# EAGLE board *FM-Radio (EAGLE 7.2.0)
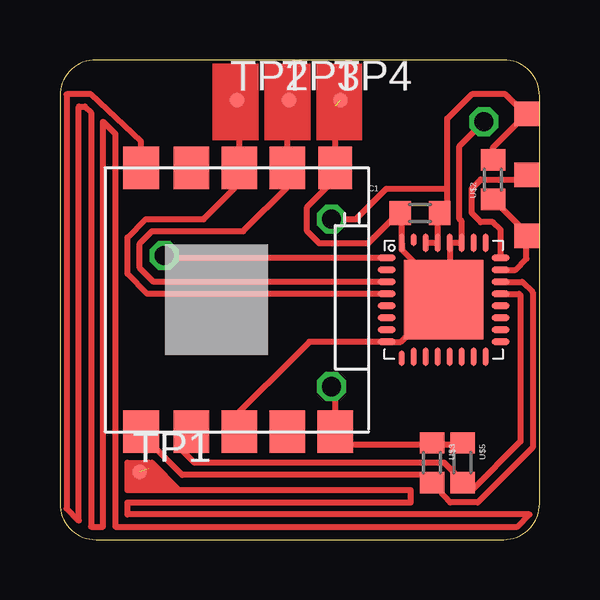
[diagram p0: board, top side]
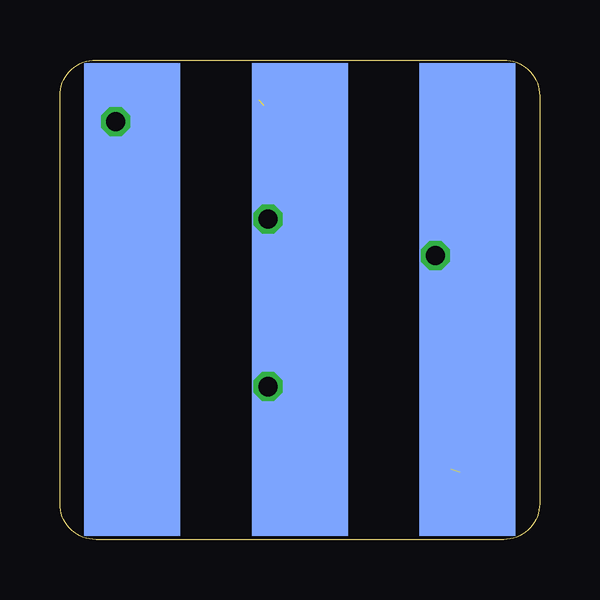
[diagram p1: board, bottom side, seen from below]

Size 20 x 20 mm. Coordinates in mm from the lower left corner, seen from the top.
Copper layers (1*16): Top 0.035mm / dielectric 1.5mm / Bottom 0.035mm
Design rules "Bilex DRU *": minimum track width 10mil, minimum drill 24mil, track to track 10mil, track to pad 10mil, pad to pad 10mil, via to via 10mil, smd to smd 10mil, copper to edge 1mil, drill to drill 8mil, minimum pad ring 10mil, minimum via ring 8mil, stop-mask expansion 4mil, vias tented up to drill 0mil, thermal gap 10mil

## Footprints (pad centres in the part's own frame; a part is rotated, then mirrored left to right if it is on the bottom)
603 = smd 0.889 x 1.016: 1 -0.826,0; 2 0.826,0
TP06R = smd 0.6 x 0.6: TP 0,0
CARRIER_SMD2_WIDE_3POL = smd 4 x 19.7 bottom: GND -6.985,3.493; RX/TX 6.985,3.493; VCC 0,3.493 | smd 1.016 x 1.016: RST -9.461,0.826; TST -9.461,-1.714; VCC'' -9.461,-4.255
FM-RADIO = smd 1.778 x 1.48: PAD1 -5.5,4; PAD2 -5.5,1.9; PAD3 -5.5,-0.1; PAD4 -5.5,-2.1; PAD5 -5.5,-4.1; PAD7 5.5,-2.1; PAD9 5.5,-0.1; PAD10 5.5,1.9; PAD11 5.5,4 | smd 1.778 x 1.4: PAD6 5.5,-4.1
QFN32 = smd 0.762 x 0.254: 1 -2.375,1.75; 2 -2.375,1.25; 3 -2.375,0.75; 4 -2.375,0.25; 5 -2.375,-0.25; 6 -2.375,-0.75; 7 -2.375,-1.25; 8 -2.375,-1.75; 17 2.375,-1.75; 18 2.375,-1.25; 19 2.375,-0.75; 20 2.375,-0.25; 21 2.375,0.25; 22 2.375,0.75; 23 2.375,1.25; 24 2.375,1.75 | smd 0.254 x 0.635: 9 -1.75,-2.438 | smd 0.254 x 0.762: 10 -1.25,-2.375; 11 -0.75,-2.375; 12 -0.25,-2.375; 13 0.25,-2.375; 14 0.75,-2.375; 15 1.25,-2.375; 16 1.75,-2.375; 25 1.75,2.375; 26 1.25,2.375; 27 0.75,2.375; 28 0.25,2.375; 29 -0.25,2.375; 30 -0.75,2.375; 32 -1.75,2.375 | smd 0.254 x 0.508: 31 -1.25,2.5 | smd 3.302 x 3.302: TP 0,0

## Placement (x,y rotation side)
C1  100n  [603]  15.01,13.62 180 top
TP1  TPTP06R  [TP06R]  3.33,2.82 0 top
TP2  TPTP06R  [TP06R]  7.39,18.32 0 top
TP3  TPTP06R  [TP06R]  9.55,18.32 0 top
TP4  TPTP06R  [TP06R]  11.71,18.32 0 top
U$1  CARRIER_SMD2SMD2_3POL_W  [CARRIER_SMD2_WIDE_3POL]  10,13.5 180 top
U$2  10k  [603]  18.06,15.01 90 top
U$3  4.7k  [603]  15.52,3.2 270 top
U$4  FM-RADIO  [FM-RADIO]  7.38,10 90 top
U$5  4.7k  [603]  16.79,3.2 270 top
U$10  MSP430G2553  [QFN32]  16,10 0 top

## Library data of the parts
C1 U$1-U$5 U$10 = thar
TP1-TP4 = testpad

## Nets
GND: C1.2 TP4.TP U$1.GND U$4.PAD3 U$4.PAD6 U$10.8 U$10.27 U$10.28 U$10.32 U$10.TP
N$2: TP2.TP U$4.PAD9 U$10.4
N$3: U$1.TST U$10.24
N$4: U$1.RST U$2.1 U$10.23
N$5: TP3.TP U$4.PAD7 U$10.3
N$6: TP1.TP U$4.PAD11
N$7: U$3.2 U$4.PAD1 U$10.22
N$11: U$4.PAD2 U$5.2 U$10.21
N$12: U$1.RX/TX U$10.1
VCC: C1.1 U$1.VCC U$1.VCC'' U$2.2 U$3.1 U$4.PAD5 U$5.1 U$10.29 U$10.30

## Tracks (layer width: path | path; a pad name or v marks a point on that pad's centre or on a via)
GND  (via drill 0.8)  (1 unrouted)
  Top 0.254: 14.15,13.46 C1.2 | U$10.TP 16.25,10.25 U$10.28 U$10.27 16.75,13.27 16.66,13.36 16.66,16.41 v17.68,17.43 | U$10.TP 16.07,9.93 16.79,9.93 15.64,11.08 15.26,11.08 14.25,12.09 U$10.32 14.25,13.55 C1.2 | U$10.TP 15.43,9.43 15.39,9.43 14.21,8.25 U$10.8 10.4,8.25 6.85,4.7 U$4.PAD3 | C1.2 14.18,13.68 14.12,13.74 | 14.12,13.74 14.12,13.87 | 11.48,18.09 U$4.PAD6 11.33,15.34 11.33,14.89 10.31,13.87 10.31,12.86 10.82,12.35 12.85,12.35 14.12,13.62 14.12,13.74
  Bottom 0.254: 18,13.5 17.93,13.56 v17.68,17.43 18,17.1 U$1.GND
N$2
  Top 0.254: 8.03,15.28 U$4.PAD9 | U$4.PAD9 7.48,18.22 TP2.TP | U$10.4 3.64,10.25 2.82,11.08 2.82,12.6 3.58,13.36 5.99,13.36 7.64,15.01 7.64,15.34 U$4.PAD9
N$3
  Top 0.254: U$10.24 18.38,12.92 18.06,13.24 17.55,13.24 17.17,13.62 17.17,14.63 17.55,15.01 19.26,15.01 U$1.TST
N$4
  Top 0.254: U$10.23 18.99,11.25 19.45,11.71 U$1.RST 19.46,12.79 U$2.1
N$5
  Top 0.254: 8.91,15.44 U$4.PAD7 | U$4.PAD7 9.48,18.25 TP3.TP | U$10.3 3.91,10.75 3.33,11.33 3.33,12.35 3.83,12.86 7.64,12.86 9.55,14.76 9.55,15.44 U$4.PAD7
N$6  (1 unrouted)
  Top 0.254: U$4.PAD11 3.38,16.61 1.29,18.57 0.28,18.57 0.28,1.3 0.79,0.79 0.79,18.06 1.04,18.06 1.29,17.81 1.29,0.54 1.8,0.54 1.8,17.43 2.31,16.92 2.31,0.54 19.07,0.54 19.58,1.04 2.82,1.04 2.82,1.55 14.63,1.55 14.63,2.06 4.98,2.06 | 4.85,2.06 2.82,2.06 2.82,3.2 3.71,3.2 | 3.71,3.2 3.83,3.2 4.98,2.06 | 4.98,2.06 4.85,2.06 | 4.85,2.06 3.71,3.2 | 3.71,3.2 3.71,2.95 4.47,2.19
N$7
  Top 0.254: U$10.22 19.27,10.75 19.71,10.31 19.71,3.84 17.42,1.55 16.28,1.55 U$3.2 15.52,2.44 15.26,2.7 5.1,2.7 3.38,4.41 U$4.PAD1
N$11
  Top 0.254: U$10.21 19.14,10.25 19.2,10.19 19.2,4.09 17.17,2.06 17.04,2.57 16.66,2.57 | U$5.2 16.66,2.57 | 16.66,2.57 16.03,3.2 5.61,3.2 4.98,3.84 4.98,3.99 U$4.PAD2
N$12  (via drill 0.8)
  Top 0.254: U$10.1 4.43,11.75 v4.34,11.84
  Bottom 0.254: U$1.RX/TX 3.01,10.51 v4.34,11.84
VCC  (via drill 0.8)
  Top 0.254: 19.5,17.52 19.46,17.56 | 19.2,17.56 19.2,17.51 | 19.2,17.51 19.46,17.56 | 19.65,17.95 19.65,17.82 | 19.65,17.82 19.65,17.75 19.46,17.56 | 19.65,17.82 19.59,17.75 U$1.VCC'' 18.06,16.35 U$2.2 | 19.2,17.51 19.2,17.69 19.59,18.07 19.08,18.07 18.58,18.57 17.17,18.57 16.15,17.55 16.15,14.63 | C1.1 15.52,13.56 15.97,13.56 16.03,13.62 16.15,13.62 16.15,13.87 | U$10.30 U$10.29 15.75,13.53 C1.1 | C1.1 15.9,13.62 16.15,13.87 | 15.52,4.35 U$3.1 15.84,4.03 15.9,3.96 | 16.85,4.35 U$5.1 16.72,3.96 15.9,3.96 | v11.33,6.38 11.48,6.22 U$4.PAD5 11.48,4.19 11.71,3.96 15.9,3.96 | 16.15,13.87 16.15,14.63 | v11.33,13.36 12.34,13.36 13.61,14.63 16.15,14.63
  Bottom 0.254: v11.33,6.38 10,7.71 U$1.VCC 10,11.27 v11.33,13.36
(copper drawn outside any net)
  shapes: Top area x6